# Altium PCB Strain.PcbDoc
Units mm, origin at the board's own origin, x right, y up, seen from the top; angles counter-clockwise.
Board outline 44.32 x 29.08 mm, 2 copper layers (Top Layer, Bottom Layer); 13 components, 31 nets, 52 pads, 0 vias.
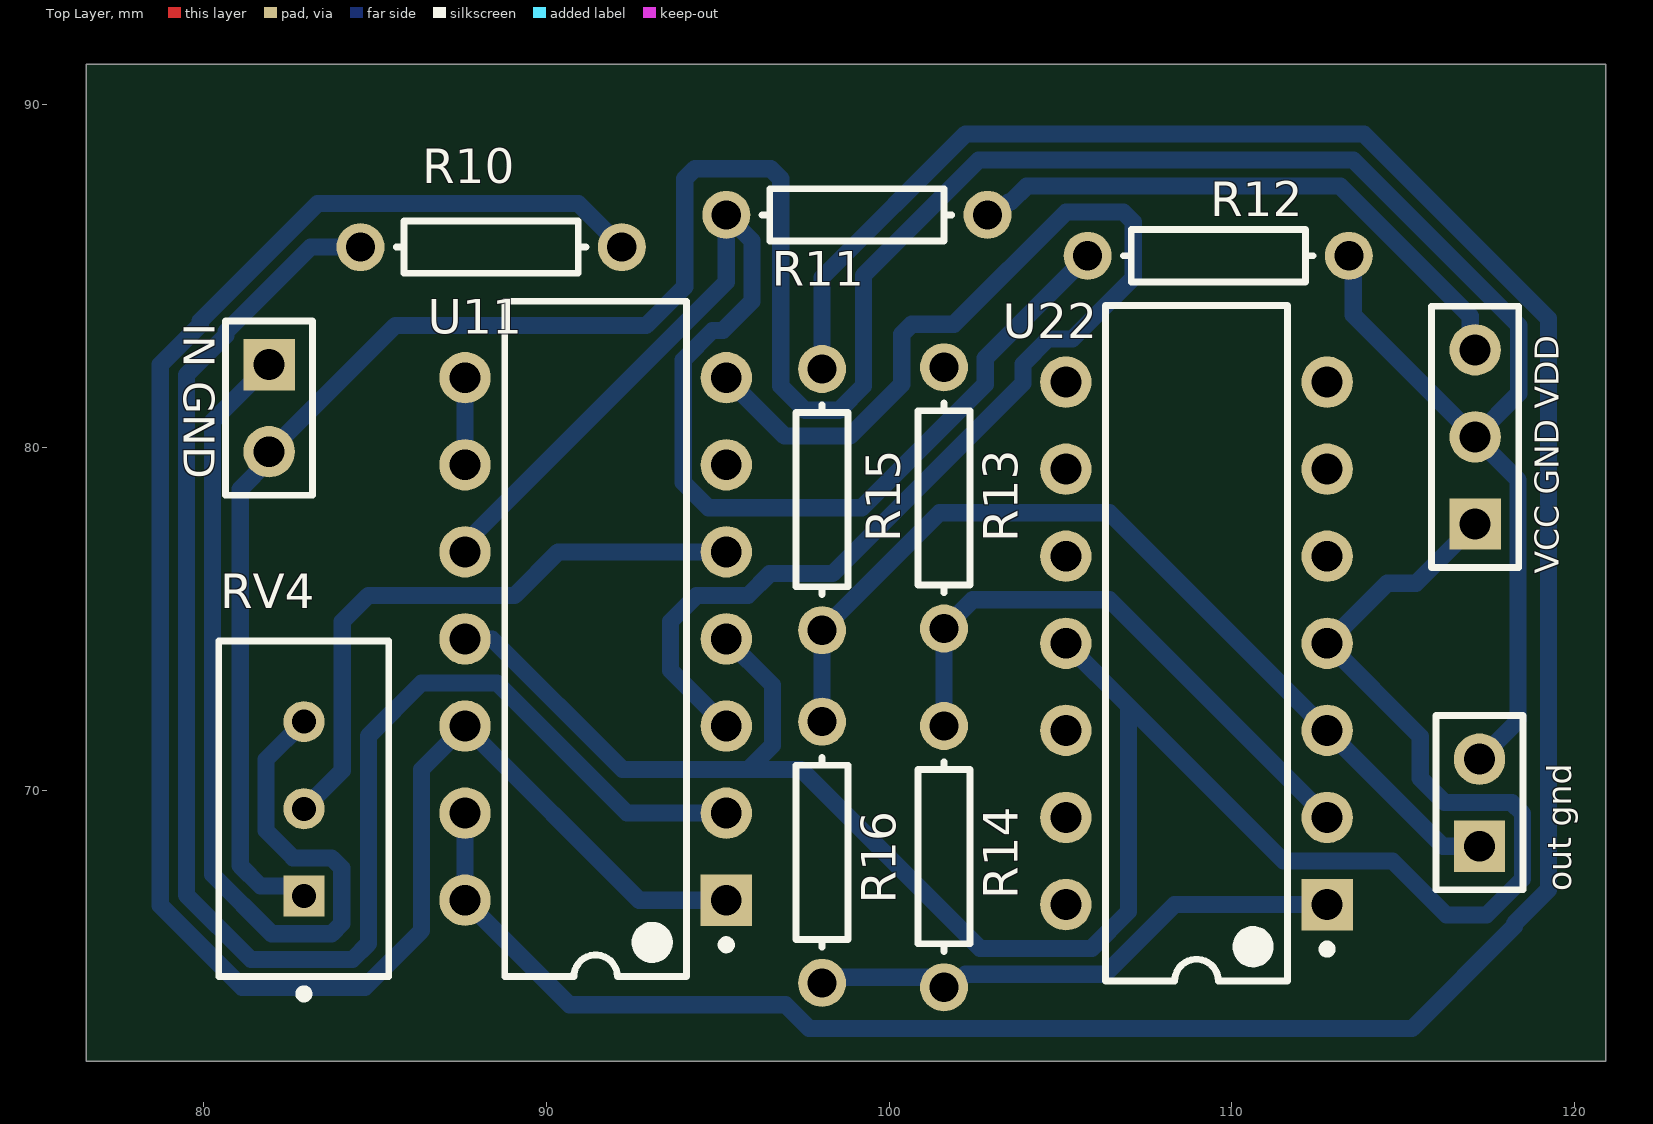
[diagram p0: Top Layer view]
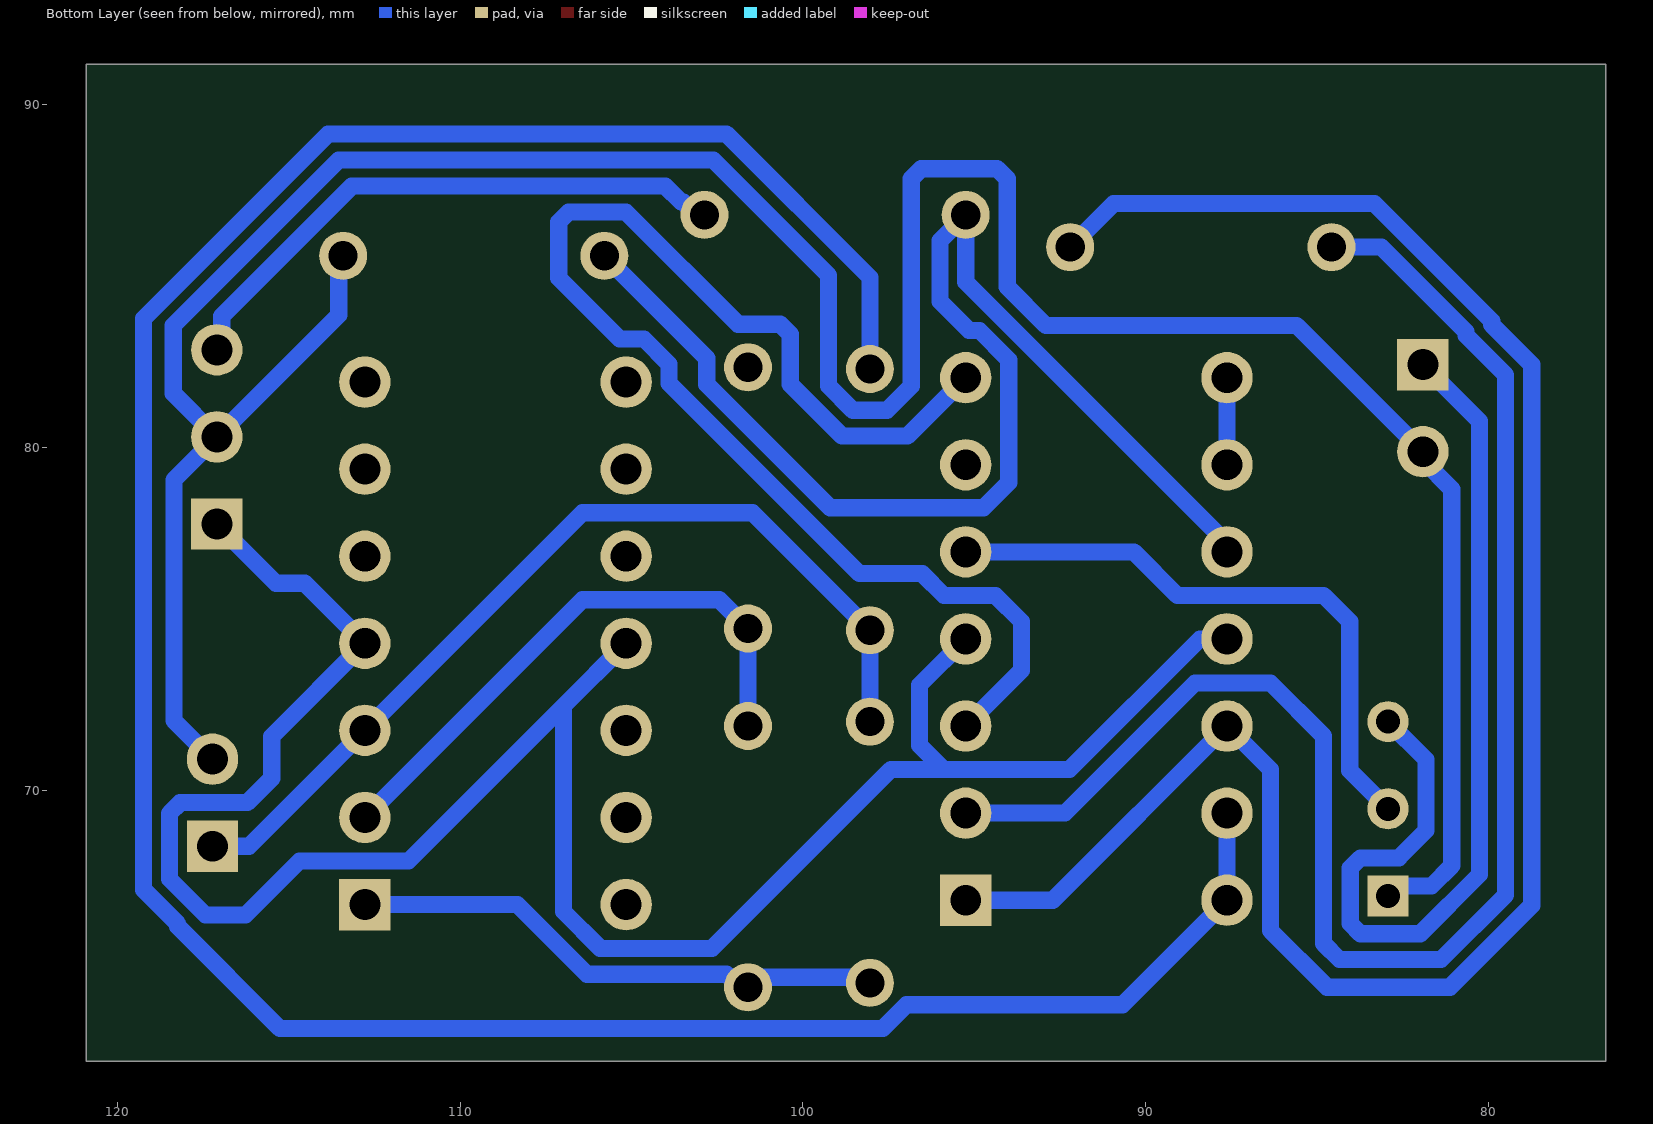
[diagram p1: Bottom Layer view, seen from below]

## Layer stack, top to bottom
Top Solder: solder mask 0.0102, Solder Resist, Dk 3.5
Top Layer: signal copper 0.0356
Dielectric 1: dielectric 0.32, FR-4, Dk 4.8
Bottom Layer: signal copper 0.0356
Bottom Solder: solder mask 0.0102, Solder Resist, Dk 3.5

## Board outline
76.581,62.103 76.581,91.186 120.904,91.186 120.904,62.103

## Design rules (kind name [scope] priority, off if disabled: settings)
Clearance Clearance_1 [All] p1: gap=0.254 ignorepadtopadclearanceinfootprint=FALSE except(0: Arc-Hole Track-Hole SMDPad-Hole THPad-Hole Via-Hole Fill-Hole Poly-Hole Region-Hole Text-Hole)
Clearance [All] p2: gap=0.254 ignorepadtopadclearanceinfootprint=FALSE except(0: Arc-Hole Track-Hole SMDPad-Hole THPad-Hole Via-Hole Fill-Hole Poly-Hole Region-Hole Text-Hole)
PolygonConnect [All] p1: connectstyle=Relief reliefconductorwidth=0.254 reliefentries=4 polygonreliefangle="90 Angle" airgapwidth=0.254
RoomDefinition [InComponentClass('Room Definition1') vs False] p1: confinementstyle=ConfineIn formatcopy=TRUE lockcomponents=FALSE outline 114.868,89.789 83.117,89.789 77.47,84.228 77.47,67.053 82.239,62.357 115.621,62.357 119.568,66.736 119.888,67.053 119.888,85.093
RoutingLayers [All] p1: top layer_v5=FALSE bottom layer_v5=TRUE
RoutingVias [All] p1: holewidth=0.711 width=1.27 viastyle="Through Hole" minholewidth=0.711 minwidth=1.27 maxholewidth=0.711 maxwidth=1.27
SolderMaskExpansion [All] p1: expansion=0.102 istentingtop=FALSE
Width [All] p1: maxlimit=1.3 minlimit=0.5 preferedwidth=1.1 toplayer_minwidth=1 bottomlayer_maxwidth=0.6 bottomlayer_prefwidth=0.5 minimp=50.000000 maximp=50.000000 favimp=50.000000
29 further rules are at their usual default settings.

## Components (designator, comment, footprint, x,y, rotation, side; value= is the part's Value field where it differs from the comment)
"IN GND" "Header 2" HDR1X2 81.915,82.423 r270 top (schematic designator PSTRAIN)
"out gnd" "Header 2" HDR1X2 117.221,68.377 r90 top (schematic designator POUT)
R10 "Res1" AXIAL-0.3 88.392,85.852 r0 top value=10k
R11 "Res1" AXIAL-0.3 99.06,86.792 r0 top value=10k
R12 "Res1" AXIAL-0.3 109.601,85.598 r180 top value=10k
R13 "Res1" AXIAL-0.3 101.6,78.537 r270 top value=625
R14 "Res1" AXIAL-0.3 101.6,68.072 r270 top value=330
R15 "Res1" AXIAL-0.3 98.044,78.486 r270 top value=625
R16 "Res1" AXIAL-0.3 98.044,68.199 r90 top value=330
RV4 "3296W-1-103LF" FP-3296W-MFG 82.926,69.469 r0 top
U11 "LF347N" N0014A 91.44,74.422 r180 top
U22 "LF347N" N0014A 108.966,74.295 r180 top
"VCC GND VDD" "Header 3" HDR1X3 117.094,77.775 r90 top (schematic designator PSOURCE)

## Footprints (in the part's own frame and the unit in brackets; to place one, negate y for a bottom-side part, rotate by r counter-clockwise, add the part's x,y. Pads: shape width x height; smd on the part's side, far side on the other; paste and mask are expansions set on the pad)
AXIAL-0.3 [mm] "Axial Device, Thru-Hole; 2 Leads; 0.3 in Pin Spacing"
  round 1.4 hole 0.85: 1(-3.81,0) 2(3.81,0)
  silkscreen extent -2.77,-0.76 2.77,0.76
FP-3296W-MFG [mm]
  rect 1.2x1.2 hole 0.7 paste-2539.97 mask+0: 1(0.005,-2.54)
  round 1.2 hole 0.7 paste-2539.97 mask+0: 2(0.005,0) 3(0.005,2.54)
  silkscreen extent -2.48,-5.52 2.48,4.89, body extent -2.58,-4.99 2.58,4.99, height 0.25
HDR1X2 [mm] "Connector; Header; 2 Position"
  rect 1.5x1.5 hole 0.9: 1(0,0)
  round 1.5 hole 0.9: 2(2.54,0)
  silkscreen extent -1.27,-1.27 3.81,1.27
HDR1X3 [mm] "Connector; Header; 3 Position"
  rect 1.5x1.5 hole 0.9: 1(0,0)
  round 1.5 hole 0.9: 2(2.54,0) 3(5.08,0)
  silkscreen extent -1.27,-1.27 6.35,1.27
N0014A [mm] "DIP, 14-Leads, Body 19.7x6.6mm, Pitch 2.54mm"
  rect 1.5x1.5 hole 0.9: 1(-3.81,7.62)
  round 1.5 hole 0.9: 2(-3.81,5.08) 3(-3.81,2.54) 4(-3.81,0) 5(-3.81,-2.54) 6(-3.81,-5.08) 7(-3.81,-7.62) 8(3.81,-7.62) 9(3.81,-5.08) 10(3.81,-2.54) 11(3.81,0) 12(3.81,2.54) 13(3.81,5.08) 14(3.81,7.62)
  silkscreen extent -3.94,-9.85 2.65,9.85, body extent -3.95,-9.85 3.95,9.85, height 5.08

## Part data
"IN GND" "out gnd": "Header, 2-Pin", LatestRevisionDate=17-Jul-2002, LatestRevisionNote="Re-released for DXP Platform.", Publisher="Altium Limited"
R10 R11 R12 R13 R14 R15 R16: "Resistor", LatestRevisionDate=17-Jul-2002, LatestRevisionNote="Re-released for DXP Platform.", PackageDescription="Axial Device, Thru-Hole; 2 Leads; 0.3 in Pin Spacing", PackageReference=AXIAL-0.3, Published=8-Jun-2000, Publisher="Altium Limited"
RV4: library part CMP-1747-00001-8, "TRIMMER 10K OHM 0.5W PC PIN TOP", Color=Blue, Insulation Resistance=1GR, Max Operating Temperature=125°C, Max Power Dissipation=500mW, Min Operating Temperature=-55°C, Package Quantity=50, Resistance=1k, Resistance Tolerance=10%, Resistor Type=Cermet, Temperature Coefficient=100ppm/°C, Contact Plating=Tin, Depth=4.83mm, Height=11.55mm, Lead Free="Lead Free", Length=9.53mm, Military Standard=Not, Mount="Through Hole", Number of Turns=25, Packaging=Rail/Tube, Power Rating=500mW, Radiation Hardening=No, Reach SVHC Compliant=Yes, RoHS Compliant=Yes, Series=3296, Taper=Linear, Technology=CERMET, Termination=Pin, Tolerance=10%, Weight=0.03oz, Width=9.53mm
U11 U22: library part CMP-0055-00229-3, "Wide Bandwidth Quad JFET Input Operational Amplifier, 14-pin MDIP", Manufacturer="Texas Instruments", Package Reference=N0014A, PackageTopMarking=NSUZXYYTTE#*LF347N, PowerWise=N, Code_JEDEC=MS-001-AA, ComponentLink1Description="Datasheet URL", ComponentLink1URL=http://www.ti.com/general/docs/lit/getliterature.tsp?genericPartNumber=LF347&fileType=pdf, CompType=Amplifiers, PackageDescription="MDIP, .750 x .250 x.130in, 14 Lead, .100in Pitch", PinCount=14, RoHS=N
"VCC GND VDD": "Header, 3-Pin", LatestRevisionDate=17-Jul-2002, LatestRevisionNote="Re-released for DXP Platform.", Publisher="Altium Limited"

## Nets (pads, with @x,y where several pads share a name; then routed paths per layer and width w, separated by ;. In a path a pad name is that pad's centre, name@x,y a point inside that pad or via, vN(x,y) a via of type N, cw(c..) or ccw(c..) an arc to the next point about the centre after c; other vN are vias at no path point)
GND: "IN GND.2" "out gnd.2" "VCC GND VDD.2" R12.1 RV4.1 | length 90.7
  Bottom Layer w0.5: RV4.1 82.643,67.217 81.666,67.217 81.073,67.81 81.073,78.79 81.915,79.632 81.915,79.883 85.598,83.566 92.914,83.566 94.041,84.693 94.041,87.845 94.334,88.138 96.547,88.138 96.84,87.845 96.84,81.797 97.545,81.092 98.543,81.092 99.248,81.797 99.248,85.024 102.616,88.392 113.538,88.392 118.364,83.566 118.364,81.585 117.094,80.315 ; R12.1@113.538,85.598 113.538,83.871 117.094,80.315 ; 117.221,70.917 118.348,72.044 118.348,79.061 117.094,80.315
NetC1_1: 
NetC2_2: 
NetC5_1: 
NetC6_2: 
NetD1_2: 
NetD3_2: 
NetIN/OUT_1: 
NetNTC_1: 
NetNTC_2: 
NetPOUT_1: "out gnd.1" R15.2 R16.2 U22.3 | length 27.3
  Bottom Layer w0.5: R16.2 R15.2 101.473,78.105 106.426,78.105 U22.3 116.154,68.377 117.221,68.377
NetPSTRAIN_1: "IN GND.1" RV4.3 | length 28.1
  Bottom Layer w0.5: 81.915,82.423 80.264,80.772 80.264,67.553 81.992,65.825 83.74,65.825 84.035,66.12 84.035,67.738 83.74,68.033 82.612,68.033 ; 82.612,68.047 81.827,68.832 81.827,70.905 RV4.3
NetR2_1: 
NetR3_1: 
NetR3_2: 
NetR4_2: 
NetR5_1: 
NetR6_1: 
NetR7_1: 
NetR9_2: R10.1 U11.2 | length 47
  Bottom Layer w0.5: R10.1@84.701,85.979 84.574,85.852 83.131,85.852 80.661,83.382 80.661,83.278 79.502,82.119 79.502,66.955 81.386,65.071 84.347,65.071 84.811,65.534 84.811,71.587 86.36,73.136 88.56,73.136 92.354,69.342 U11.2
NetR10_2: R10.2 U11.1 U11.12 | length 57.3
  Bottom Layer w0.5: R10.2 90.932,87.122 83.335,87.122 79.907,83.694 79.907,83.59 78.74,82.423 78.74,66.651 81.129,64.262 84.709,64.262 86.36,65.913 86.36,70.612 U11.12 92.71,66.802 U11.1
NetR11_1: R11.1 R12.2 U11.10 | length 37.7
  Bottom Layer w0.5: U11.10 87.63,77.216 95.25,84.836 R11.1 96.004,86.038 96.004,84.27 95.15,83.416 94.85,83.416 93.996,82.561 93.996,78.983 94.731,78.248 99.204,78.248 102.804,81.848 102.804,82.611 R12.2
NetR13_2: R13.2 R14.1 U22.2 | length 17
  Bottom Layer w0.5: R14.1 R13.2 102.438,75.565 106.426,75.565 U22.2
NetR14_2: R14.2 R16.1 U22.1 | length 15.9
  Bottom Layer w0.5: R16.1 98.21,64.555 101.307,64.555 R14.2 101.844,64.262 102.225,64.643 106.299,64.643 108.331,66.675 U22.1
NetR15_1: R15.1 U11.13 U11.14 | length 81.9
  Bottom Layer w0.5: U11.13 U11.14 90.678,63.754 96.976,63.754 97.672,63.058 115.255,63.058 118.237,66.04 118.237,66.114 119.229,67.106 119.229,83.767 113.85,89.146 113.673,89.146 113.665,89.154 102.235,89.154 98.044,84.963 R15.1
NetRV3_2: 
NetRV4_2: RV4.2 U11.5 | length 18
  Bottom Layer w0.5: RV4.2 84.049,70.587 84.049,74.93 84.811,75.692 89.078,75.692 90.348,76.962 U11.5
NetU11_3: U11.3 U11.7 | length 39.6
  Bottom Layer w0.5: U11.3 93.624,73.508 93.624,74.93 94.386,75.692 95.885,75.692 96.52,76.327 98.349,76.327 103.902,81.88 103.902,82.434 104.637,83.169 105.343,83.169 107.122,84.948 107.122,86.583 106.829,86.876 105.164,86.876 101.889,83.601 100.662,83.601 100.369,83.308 100.369,81.852 98.855,80.338 96.954,80.338 U11.7
NetU11_8: U11.8 U11.9 | length 2.5
  Bottom Layer w0.5: U11.9 U11.8
VCC: "VCC GND VDD.1" U11.4 U11.11 U22.4 U22.11 | length 67.4
  Bottom Layer w0.5: U11.11 88.417,74.422 92.227,70.612 94.132,70.612 95.885,70.612 ; U11.4 96.596,73.076 96.596,71.323 95.885,70.612 ; U22.11 106.985,72.466 ; 117.094,77.775 115.367,76.048 114.529,76.048 U22.4 115.494,71.577 115.494,70.358 116.205,69.647 118.164,69.647 118.475,69.336 118.475,67.418 117.427,66.37 116.256,66.37 114.681,67.945 111.506,67.945 106.985,72.466 ; 95.885,70.612 97.434,70.612 102.649,65.397 105.91,65.397 106.985,66.472 106.985,72.466
VDD: "VCC GND VDD.3" R11.2 | length 17
  Bottom Layer w0.5: R11.2 103.114,86.792 103.486,87.165 103.548,87.165 104.013,87.63 113.157,87.63 116.952,83.835 116.952,82.996 117.094,82.855
pads on no net: R13.1 U11.6 U22.5 U22.6 U22.7 U22.8 U22.9 U22.10 U22.12 U22.13 U22.14